# Altium PCB ElvipPCB.PcbDoc (part 2 of 3)
Units mm, origin at the board's own origin, x right, y up, seen from the top; angles counter-clockwise.
Board outline 279.53 x 216.03 mm, 2 copper layers (Top Layer, Bottom Layer), stack 2.071 mm thick; 97 components, 303 nets, 932 pads, 720 vias.
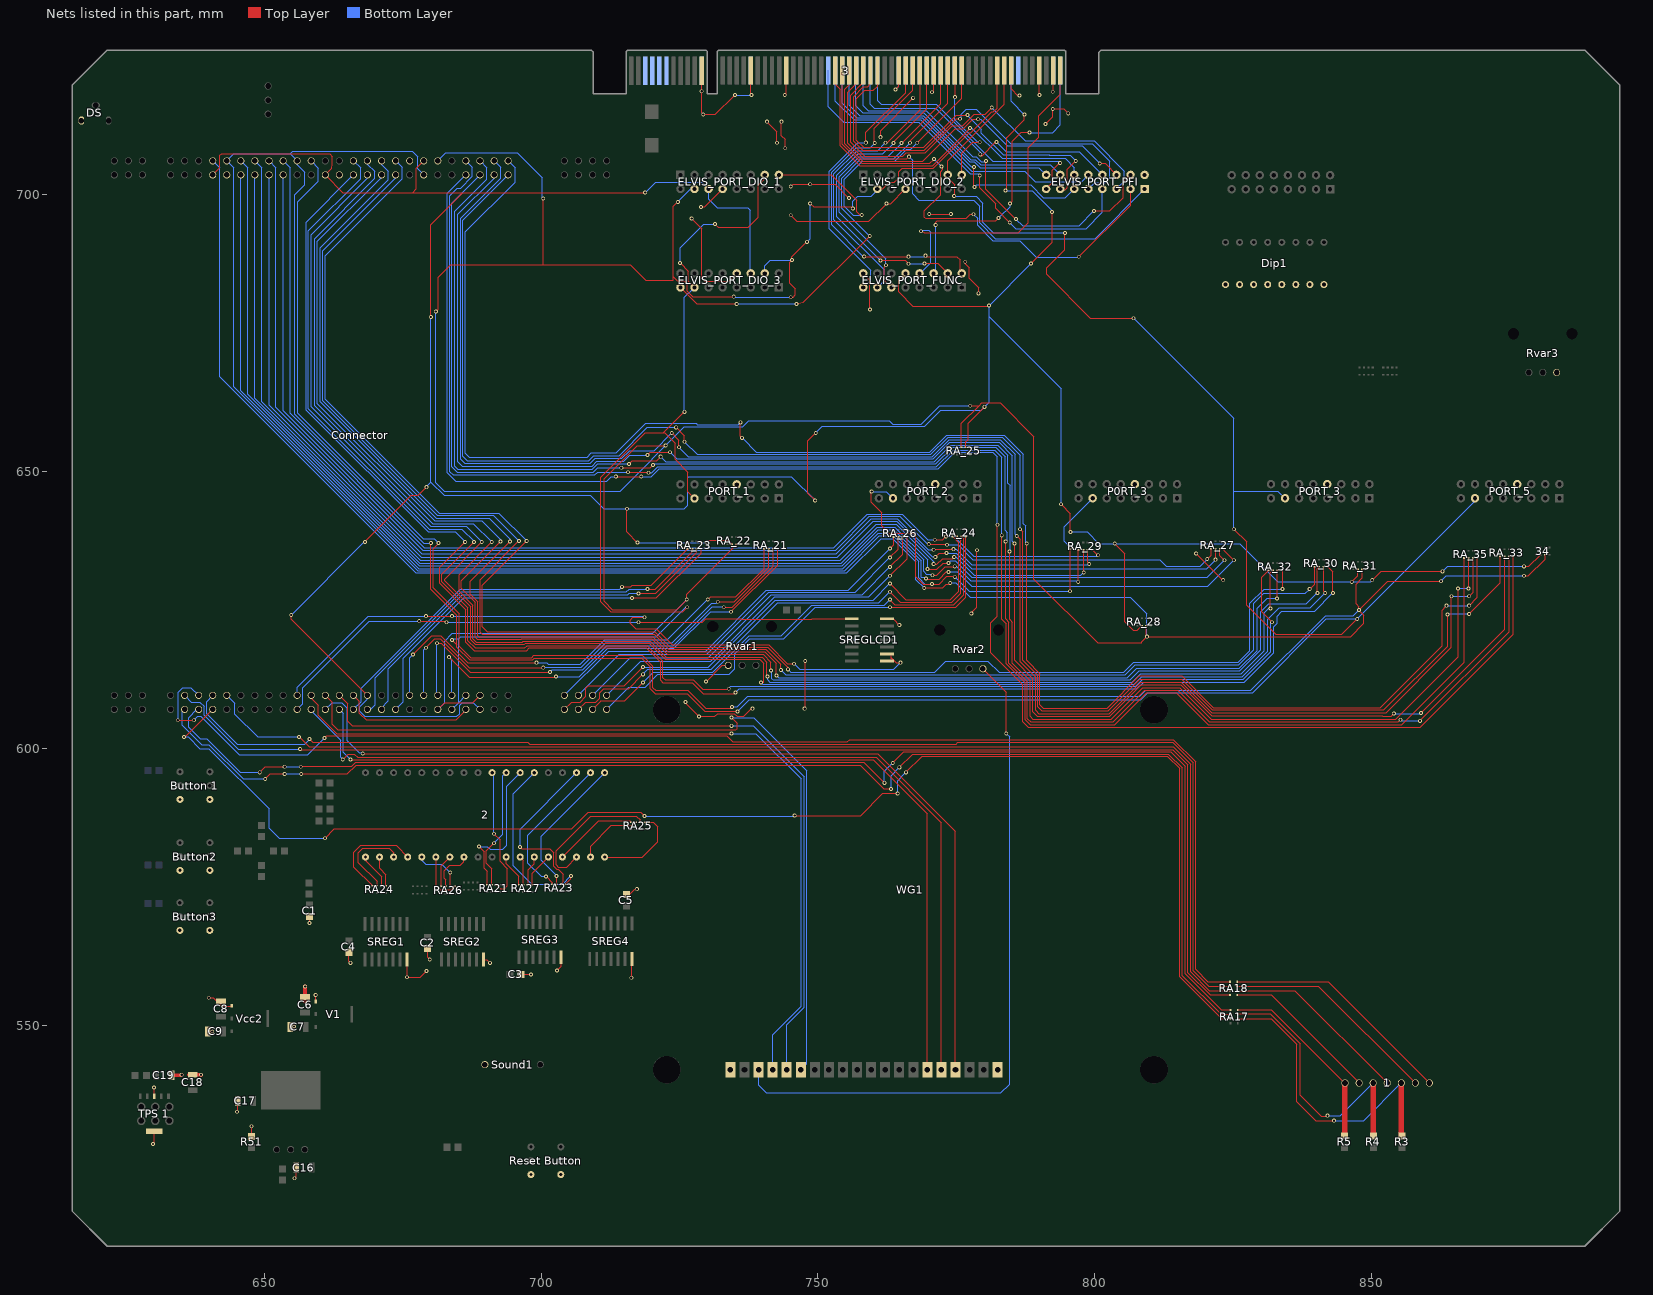
[diagram p2: the nets of this part, all layers, seen from the top]

## Via types
v1: diameter 0.7, hole 0.4, Top Layer to Bottom Layer, 720 vias

## Nets (pads, with @x,y where several pads share a name; then routed paths per layer and width w, separated by ;. In a path a pad name is that pad's centre, name@x,y a point inside that pad or via, vN(x,y) a via of type N, cw(c..) or ccw(c..) an arc to the next point about the centre after c; other vN are vias at no path point) (continued)
E_GEN: 3.50 Connector.8 Connector.13 Connector.43 Connector.89 Connector.105 ELVIS_PORT_DIO_1.6 ELVIS_PORT_DIO_2.6 ELVIS_PORT_DIO_3.6 P0RT_3.6 PORT_1.6 PORT_2.6 PORT_3.6 PORT_5.6 | length 979.9
  Top Layer w0.2: v1(680.1,637.1) 680.1,628.8 684.8,624.1 684.8,618.7 ; v1(683.9,619.6) 684.8,618.7 ; 722.1,657 v1(725.9,660.8) ; v1(725.1,687.7) 726.6,686.2 726.6,684.37 ELVIS_PORT_DIO_3.6@727.71,683.26 ; v1(726.4,625.5) 725.6,624.7 712.6,624.7 710.8,626.5 710.8,649 718.8,657 722.3,657 724.2,655.1 724.2,652.2 726.5,649.9 726.5,646.37 PORT_1.6@727.71,645.16 ; v1(731.4,694.7) 732,694.1 737.4,694.1 739.2,695.9 739.2,701.7 740.41,702.91 ELVIS_PORT_DIO_1.6@740.41,703.58 ; v1(735.5,606.7) 729.6,606.7 726.4,609.9 720.6,609.9 719.7,610.8 719.7,614.8 718.2,616.3 698.8,616.3 698.5,616 687.1,616 684.8,618.3 684.8,618.7 ; v1(759.7,646.4) 759.6,646.3 759.6,644.5 761.5,642.6 761.5,640.2 762.8,638.9 767.2,638.9 767.7,638.4 767.7,631 769,629.7 v1(770.6,629.7) 771.9,629.7 773.3,631.1 774.6,631.1 v1(774.7,631) ; v1(774.6,699.8) 774.7,699.9 774.7,701.8 773.43,703.07 ELVIS_PORT_DIO_2.6@773.43,703.58 773.43,706.12 783.62,716.31 3.50@783.62,722.46 ; v1(794.6,693.1) 794.6,690.1 791.3,686.8 791.3,685.6 799.2,677.7 v1(807,677.7) ; v1(795.5,628.4) 795.6,628.5 v1(795.6,636.3) ; v1(825.1,639.6) 827.4,637.3 827.4,625.9 832.7,620.6 844.6,620.6 v1(847.4,623.4)
  Bottom Layer w0.2: Connector.43@678.815,703.58 677.7,704.695 677.7,706.9 676.7,707.9 655.175,707.9 654.675,707.4 ; v1(680.1,637.1) 678.8,637.1 655.5,660.4 655.5,700 657.3,701.8 657.3,704.1 655.955,705.445 Connector.13@655.955,706.12 654.675,707.4 ; Connector.105@683.895,607.06 685.1,608.265 ; v1(683.9,619.6) 684.1,619.8 685.1,619.8 ; Connector.89@686.435,609.6 685.1,608.265 ; v1(725.1,687.7) 725.1,690.4 729.4,694.7 v1(731.4,694.7) ; v1@725.9,660.9 725.9,681.45 ELVIS_PORT_DIO_3.6@727.71,683.26 ; v1(726.4,625.5) 726.4,625.6 726.2,625.6 720.8,620.2 685.5,620.2 685.1,619.8 ; v1(735.5,606.7) 737.6,608.8 808.3,608.8 809.6,610.1 828.5,610.1 841.8,623.4 v1(847.4,623.4) 868.65,644.65 PORT_5.6@868.65,645.2 ; v1(759.7,646.4) 762.35,646.4 PORT_2.6@763.55,645.2 ; v1(770.6,629.7) 769.3,629.7 768.2,630.8 768.2,633.8 763.6,638.4 761.1,638.4 754.8,632.1 677.7,632.1 644.5,665.3 644.5,704.875 Connector.8@643.255,706.12 644.535,707.4 654.675,707.4 ; v1(774.6,699.8) 774.7,699.7 778.6,699.7 779.8,698.5 779.8,695 781.7,693.1 v1(794.6,693.1) ; v1(774.7,631) 777.3,628.4 v1(795.5,628.4) ; v1(795.6,636.3) 794.5,637.4 794.5,640.09 P0RT_3.6@799.61,645.2 ; v1(807,677.7) 825.1,659.6 825.1,646.5 ; v1(825.1,639.6) 825.1,646.5 ; PORT_3.6@834.35,645.2 833.05,646.5 825.1,646.5 ; 685.1,608.265 685.1,619.8
E_PF_12: 3.33 ELVIS_PORT_PFI.6 | length 68.9
  Top Layer w0.2: 3.33@760.99,722.23 3.33@760.76,722.46 760.76,719.6 760.01,718.85 758.47,718.85 756.94,717.32 756.94,709.84 758.23,708.55 769.09,708.55 774.94,714.4 v1(777,714.4) ; ELVIS_PORT_PFI.6@793.75,701.04 793.93,700.86 794.66,700.86 795.05,701.25 795.05,704.61 v1(796.55,706.11)
  Bottom Layer w0.2: v1(777,714.4) 779.53,711.87 779.53,711.11 783.46,707.18 791.76,707.18 791.8,707.14 795.52,707.14 v1(796.55,706.11)
E_PFI_0: 3.30 ELVIS_PORT_PFI.0 | length 84.2
  Top Layer w0.2: 3.30@756.95,722.46 756.95,720.05 755.38,718.48 755.38,709.33 758.23,706.48 766.06,706.48 v1(766.46,706.88) v1@766.65,706.69
  Bottom Layer w0.2: v1@766.435,706.855 767.09,706.2 767.09,700.14 768.19,699.04 778.13,699.04 779.24,697.93 779.24,694.9 779.22,694.9 782.02,692.1 800.05,692.1 ELVIS_PORT_PFI.0@808.99,701.04
E_PFI_1: 3.88 ELVIS_PORT_PFI.8 | length 47
  Bottom Layer w0.2: 3.88@755.68,722.46 755.68,716.2 757.58,714.3 769.05,714.3 777.43,705.92 778.25,705.92 779.28,704.89 789.9,704.89 ELVIS_PORT_PFI.8@791.21,703.58
E_PFI_2: 3.28 ELVIS_PORT_PFI.1 | length 92.8
  Top Layer w0.2: 3.28@754.41,722.46 754.41,709.14 757.88,705.67 770.18,705.67 v1(770.96,706.45) ; v1(772.3,705.1) 772.45,704.95 772.58,704.95 772.58,704.58 772.15,704.15 772.15,700.02 769.23,697.1 769.23,695.97 769.48,695.72 776.22,695.72 776.26,695.76 776.76,695.76 777.48,696.48 v1(778.09,696.48) ; v1@797.05,688.69 806.45,698.09 ELVIS_PORT_PFI.1@806.45,701.04
  Bottom Layer w0.2: v1(770.96,706.45) 772.3,705.11 v1(772.3,705.1) ; v1(778.09,696.48) 778.82,695.75 778.82,694.46 781.58,691.7 786.4,691.7 789.41,688.69 796.99,688.69 v1(797.1,688.8)
E_PFI_3: 3.87 ELVIS_PORT_PFI.9 | length 48.5
  Bottom Layer w0.2: 3.87@756.95,722.46 756.81,722.32 756.81,716.09 758.1,714.8 769.15,714.8 777.6,706.35 778.42,706.35 779.39,705.38 791.95,705.38 ELVIS_PORT_PFI.9@793.75,703.58
E_PFI_4: 3.31 ELVIS_PORT_PFI.2 | length 76.6
  Top Layer w0.2: 3.31@758.22,722.46 758.22,720.33 755.9,718.01 755.9,709.49 758.43,706.96 765.35,706.96 765.98,707.59 769.39,707.59 769.38,707.6 774.28,712.5 776.19,712.5 778.22,714.53 780.17,714.53 v1(781.39,715.75)
  Bottom Layer w0.2: v1(781.39,715.75) 787.42,709.72 799.86,709.72 805.34,704.24 805.34,702.47 ELVIS_PORT_PFI.2@803.91,701.04
E_PFI_5: 3.27 ELVIS_PORT_PFI.10 | length 65.2
  Top Layer w0.2: 3.27@753.14,722.46 753.14,719.91 753.99,719.06 753.99,708.84 757.59,705.24 770.74,705.24 777.26,711.76 777.26,711.84 v1(777.45,712.03)
  Bottom Layer w0.2: v1@777.19,712.03 777.78,712.03 783.24,706.57 794.62,706.57 796.29,704.9 ELVIS_PORT_PFI.10@796.29,703.58
E_PFI_6: 3.91 ELVIS_PORT_PFI.3 | length 72.4
  Top Layer w0.2: v1(779.22,703.49) 779.22,701.25 782.07,698.4 782.07,697.54 v1(784.64,694.97)
  Bottom Layer w0.2: 3.91@751.87,722.46 751.87,715.87 754.64,713.1 768.18,713.1 777.53,703.75 778.96,703.75 v1(779.22,703.49) ; v1(784.64,694.97) 785.71,693.9 798.46,693.9 801.38,696.82 ELVIS_PORT_PFI.3@801.38,701
E_PFI_7: 3.90 ELVIS_PORT_PFI.11 | length 57.8
  Bottom Layer w0.2: 3.90@753.14,722.46 753.14,716.9 756.54,713.5 768.53,713.5 777.77,704.26 787.32,704.26 789.22,702.36 797.61,702.36 ELVIS_PORT_PFI.11@798.83,703.58
E_PFI_8: 3.32 ELVIS_PORT_PFI.4 | length 77.3
  Top Layer w0.2: 3.32@759.49,722.46 759.49,720.01 758.97,719.49 758.19,719.49 756.43,717.73 756.43,709.68 758.11,708 769.21,708 774.94,713.73 v1(775.64,713.73) ; v1(775.64,713.73) 775.7,713.73 775.84,713.59 775.78,713.59 v1(775.64,713.73)
  Bottom Layer w0.2: v1(775.64,713.73) 775.7,713.73 775.84,713.59 775.84,714.5 775.85,714.5 776.8,715.45 778.63,715.45 784.83,709.25 799.51,709.25 802.72,706.04 802.72,703.06 801.85,702.19 799.98,702.19 ELVIS_PORT_PFI.4@798.83,701.04
E_PFI_9: 3.85 ELVIS_PORT_PFI.12 | length 56
  Top Layer w0.2: v1(779.3,707.3) 779.55,707.05 779.55,706.96 782.14,709.55 v1(782.24,709.55)
  Bottom Layer w0.2: 3.85@759.49,722.46 759.49,716.31 760.2,715.6 771.31,715.6 779.55,707.36 779.49,707.3 v1(779.3,707.3) ; v1(782.24,709.55) 784.01,707.78 797.17,707.78 ELVIS_PORT_PFI.12@801.37,703.58
E_PFI_10: 3.89 ELVIS_PORT_PFI.5 | length 58
  Top Layer w0.2: v1(778.18,705.02) 778.18,701.63 778.125,701.575 v1(778.29,701.41)
  Bottom Layer w0.2: 3.89@754.41,722.46 754.41,716.54 757.05,713.9 768.84,713.9 777.72,705.02 v1(778.18,705.02) ; v1@778.265,701.385 778.66,701.78 788.39,701.78 790.72,699.45 794.7,699.45 ELVIS_PORT_PFI.5@796.29,701.04
E_PFI_11: 3.29 ELVIS_PORT_PFI.13 | length 71.2
  Top Layer w0.2: 3.29@755.68,722.46 755.68,719.86 754.88,719.06 754.88,709.25 758.05,706.08 768.97,706.08 774.82,711.93 776.22,711.93 777.92,713.63 v1(778.93,713.63) ; v1(800.9,705.65) 801.84,705.65 ELVIS_PORT_PFI.13@803.91,703.58
  Bottom Layer w0.2: v1(778.93,713.63) 779.39,713.63 784.17,708.85 797.7,708.85 v1(800.9,705.65)
E_PFI_13: 3.86 ELVIS_PORT_PFI.14 | length 72.2
  Top Layer w0.2: v1(780.33,706.11) 780.33,701.01 v1@785.76,695.58 ; v1(785.76,695.6) v1@785.76,695.58 ; v1@785.79,695.55 v1@785.76,695.58 ; v1(799.83,697.07) 802.72,697.07 805.14,699.49 805.14,702.27 ELVIS_PORT_PFI.14@806.45,703.58
  Bottom Layer w0.2: 3.86@758.22,722.46 758.22,716.04 759.06,715.2 769.57,715.2 777.92,706.85 778.61,706.85 779.47,705.99 780.21,705.99 v1(780.33,706.11) ; v1(785.76,695.6) 786.97,694.39 797.15,694.39 v1(799.83,697.07)
E_PFI_14: 3.84 ELVIS_PORT_PFI.7 | length 48.9
  Top Layer w0.2: ELVIS_PORT_PFI.7@791.21,701.04 792.31,702.14 792.31,704.46 793.58,705.73 v1(793.74,705.73)
  Bottom Layer w0.2: 3.84@760.76,722.46 760.76,717 761.46,716.3 771.33,716.3 781.61,706.02 793.45,706.02 v1(793.74,705.73)
E_SUP+: 3.59 ELVIS_PORT_FUNC.13 | length 55.7
  Top Layer w0.2: v1(771.26,694.52) 771.26,694.99 771.57,695.3 782.1,695.3 v1(782.6,695.8) ; v1(784.69,698.4) 785.1,698.81 785.1,709.66 786.69,711.25 v1(788.19,711.25)
  Bottom Layer w0.2: ELVIS_PORT_FUNC.13@770.89,685.8 771.26,686.17 v1(771.26,694.52) ; v1(782.6,695.8) 782.94,696.14 782.96,696.14 784.69,697.87 v1(784.69,698.4) ; v1(788.19,711.25) 788.2,711.24 792.37,711.24 793.78,712.65 3.59@793.78,722.46
E_SUP-: 3.58 ELVIS_PORT_FUNC.12 | length 60.8
  Top Layer w0.2: ELVIS_PORT_FUNC.12@768.2,685.95 ELVIS_PORT_FUNC.12@768.35,685.8 ; v1(768.6,693.4) 768.86,693.4 769.16,693.1 786.17,693.1 787.98,694.91 787.98,708.46 789.9,710.38 789.9,714.26 793.75,718.11 793.75,722.43 3.58@793.78,722.46
  Bottom Layer w0.2: ELVIS_PORT_FUNC.12@768.35,685.8 768.5,685.8 770.4,687.7 770.4,693.2 770,693.6 768.8,693.6 v1(768.6,693.4)
E_SYNC: 3.49 34.1 Connector.7 Connector.14 Connector.23 Connector.90 Connector.106 ELVIS_PORT_DIO_1.14 ELVIS_PORT_DIO_2.14 ELVIS_PORT_DIO_3.14 RA_22.5 RA_25.5 RA_28.1 RA_31.5 | length 1159.1
  Top Layer w0.2: v1(681,678.9) 681.4,679.3 681.4,685.1 683.7,687.4 700.4,687.4 ; Connector.106@681.355,607.06 682.595,608.3 687.675,608.3 Connector.90@688.975,609.6 ; v1(681.5,637.1) 680.5,636.1 680.5,629 685.2,624.3 685.2,618.5 687.3,616.4 698.3,616.4 698.7,616.8 718.3,616.8 720.2,614.9 720.2,611 720.7,610.5 726.5,610.5 729.7,607.3 734.3,607.3 v1(734.5,607.5) ; v1(700.4,699.3) 700.4,687.4 ; v1(722.5,654.7) 717.4,654.7 711.4,648.7 711.4,626.6 712.9,625.1 724.5,625.1 v1(726.3,626.9) 726.3,627.9 RA_22.5@735.3,636.9 ; v1(724.7,698.7) 723.9,697.9 723.9,685.2 ; v1(734.8,681.6) 727.4,681.6 726.4,682.6 726.4,683.9 725.8,684.5 724.6,684.5 723.9,685.2 ; v1(745.1,681.5) 745.5,681.5 745.9,681.9 745.9,683 744.9,684 744.9,687.8 v1(745.3,688.2) 745.3,688.8 v1(748,691.5) ; v1(748.6,698.4) 749.2,697.8 756.3,697.8 v1(756.3,697.5) ; ELVIS_PORT_DIO_2.14@760.73,701.04 761.66,701.04 762.86,702.24 763.82,702.24 764.55,702.97 764.55,704.11 765.19,704.75 770.85,704.75 777.3,711.2 777.6,711.2 781.4,715 781.7,715 782.35,715.65 3.49@782.35,722.46 ; v1(769.2,629) 772.5,629 773.2,629.7 773.7,629.7 v1(773.9,629.9) ; RA_25.5@775.9,654.4 775.9,658.7 779.1,661.9 ; v1(777.5,661.9) 779.1,661.9 ; RA_28.1@809.3,622.2 809.3,620.3 v1(809.4,620.2) ; v1@847.5,625.2 v1(847.7,625) ; RA_31.5@848.3,632.4 848.3,630.8 847.2,629.7 847.2,626.1 847.7,625.6 v1(847.7,625) ; v1(862.5,630.2) 852.9,630.2 v1(847.7,625) ; v1(877.5,631.2) 878.3,631.2 881.3,634.2 34.1@881.3,635 ; 700.4,687.4 716.1,687.4 718.9,684.6 723.9,684.6 723.9,685.2 ; 779.1,661.9 779.6,662.4 782.9,662.4 789,656.3 789,630.6 800.5,619.1 808.5,619.1 808.5,619.3 v1(809.4,620.2) ; v1(809.4,620.2) 846.2,620.2 848.6,622.6 848.6,624.1 v1(847.7,625)
  Bottom Layer w0.2: Connector.7@640.715,706.12 642,704.835 642,667.1 677.4,631.7 755.2,631.7 761.4,637.9 763.5,637.9 767.7,633.7 767.7,630.5 v1(769.2,629) ; Connector.14@658.495,706.12 659.8,704.815 659.8,702.4 656.1,698.7 656.1,660.5 678.7,637.9 680.7,637.9 v1(681.5,637.1) ; v1(681,678.9) 681,648 682.5,646.5 714.3,646.5 725.9,658.1 736.4,658.1 737.5,659.2 762.9,659.2 763.5,658.6 768.7,658.6 ; Connector.106@681.355,607.06 682.6,608.305 682.6,619.4 684,620.8 720.2,620.8 v1(726.3,626.9) ; Connector.23@681.355,706.12 682.835,707.6 695.7,707.6 700.2,703.1 700.2,699.5 v1(700.4,699.3) ; v1(724.7,698.7) 727.04,701.04 ELVIS_PORT_DIO_1.14@727.71,701.04 ; v1(734.5,607.5) 735.4,607.5 737.3,609.4 808.1,609.4 809.2,610.5 828.2,610.5 841.7,624 846.7,624 v1(847.7,625) ; v1(734.8,681.6) 734.9,681.5 v1(745.1,681.5) ; ELVIS_PORT_DIO_3.14@740.41,685.8 740.41,687.21 741.4,688.2 v1(745.3,688.2) ; v1(748,691.5) 748.6,692.1 v1(748.6,698.4) ; v1(756.3,697.5) 756.3,698.8 757.2,699.7 759.6,699.7 760.73,700.83 ELVIS_PORT_DIO_2.14@760.73,701.04 ; 769,658.9 768.7,658.6 ; v1(773.9,629.9) 774.9,629.9 777.5,627.3 806.4,627.3 809.4,624.3 v1(809.4,620.2) ; v1(777.5,661.9) 772,661.9 768.7,658.6 ; v1(862.5,630.2) 863.5,631.2 v1(877.5,631.2)
E_VCC: 3.66 34.2 Connector.22 Connector.50 Connector.58 Connector.82 Connector.103 ELVIS_PORT_DIO_1.13 ELVIS_PORT_DIO_3.13 ELVIS_PORT_FUNC.11 RA_22.6 RA_25.6 RA_28.2 RA_31.6 | length 677.4
  Top Layer w0.2: Connector.58@640.715,703.58 642,704.865 642,707.1 642.3,707.4 661.8,707.4 662.3,706.9 662.3,705.2 662.2,705.1 662.2,704.745 Connector.50@661.035,703.58 664.215,700.4 676.8,700.4 ; v1(654.9,624.1) 654.9,623.355 Connector.82@668.655,609.6 ; v1(668.2,637.3) 676.6,645.7 677.8,645.7 v1(679.3,647.2) ; Connector.22@678.815,706.12 677.5,704.805 677.5,701.1 676.8,700.4 ; v1(680.1,677.9) 680.1,694.6 685.9,700.4 ; v1@715.5,643.4 715.5,639.1 v1(717.4,637.2) ; v1(718.8,700.4) 685.9,700.4 ; v1(730,637.2) 730.4,637.6 733.8,637.6 RA_22.6@734.5,636.9 ; v1(749.5,644.8) 748.2,646.1 748.2,655.6 v1(749.6,657) ; ELVIS_PORT_FUNC.11@765.81,685.8 764.56,684.55 764.56,682.45 767.16,679.85 780.75,679.85 v1(780.9,680) ; RA_25.6@776.7,654.4 776.7,655.4 777.1,655.8 777.1,658.7 v1(780.1,661.7) ; v1(783.85,700.76) 784.06,700.97 784.06,710.38 784.17,710.38 787.29,713.5 v1(787.29,714.47) ; v1(788.5,687.6) 792.28,691.38 v1(792.28,696.91) ; v1(793.9,644.1) 795.6,642.4 v1(795.6,639.1) ; v1(803.6,637) 805.4,635.2 805.4,622.9 806.9,621.4 807.7,621.4 RA_28.2@808.5,622.2 ; v1(846.4,630.1) 847.5,631.2 RA_31.6@847.5,632.4 ; v1(850.1,630.4) 851.7,632 v1(862.8,632) ; v1(877.5,632.9) 878.4,632.9 34.2@880.5,635 ; 676.8,700.4 685.9,700.4
  Bottom Layer w0.2: v1(654.9,624.1) 668.1,637.3 v1(668.2,637.3) ; Connector.82@668.655,609.6 668.655,608.855 667.3,607.5 667.3,606.7 668.2,605.8 684.8,605.8 685.3,606.3 685.3,607.8 685.8,608.3 687.735,608.3 Connector.103@688.975,607.06 ; v1(679.3,647.2) 679.3,647.3 680.1,648.1 ; v1(680.1,677.9) 680.1,648.1 ; v1(717.4,637.2) v1(730,637.2) ; v1(718.8,700.4) 720.7,702.3 728.99,702.3 ELVIS_PORT_DIO_1.13@730.25,701.04 730.25,699.18 731.78,697.65 737.35,697.65 737.77,697.23 737.77,685.9 ELVIS_PORT_DIO_3.13@737.87,685.8 ; v1(749.5,644.8) 745.2,649.1 726.7,649.1 726.5,648.9 726.5,643.95 725.85,643.3 711.3,643.3 708.9,645.7 682.5,645.7 680.1,648.1 ; v1(749.6,657) 750.8,658.2 769.3,658.2 772.2,661.1 779.5,661.1 780.9,662.5 v1(780.9,680) v1(788.5,687.6) ; 780.9,678 793.9,665 v1(793.9,644.1) ; v1(783.85,700.76) 788.67,700.76 792.28,697.15 v1(792.28,696.91) ; 3.66@784.89,722.46 784.89,716.87 v1(787.29,714.47) ; v1(795.6,639.1) 798.6,639.1 800.7,637 v1(803.6,637) 826.15,637 833.05,630.1 v1(846.4,630.1) 849.8,630.1 v1(850.1,630.4) ; v1(862.8,632) 863.7,632.9 v1(877.5,632.9)
  other v1: 715.5,643.3
EAI_0+: 3.45 ELVIS_PORT_DIO_1.7 | length 60.2
  Top Layer w0.2: ELVIS_PORT_DIO_1.7@742.95,703.58 752.42,703.58 757,699 757,696.94 757.62,696.32 v1(757.92,696.32) ; v1(767.94,709.39) 776,717.45 3.45@776,722.46
  Bottom Layer w0.2: v1(757.92,696.32) 756.37,696.32 754.79,697.9 754.79,702.79 758.03,706.03 763.84,706.03 766.02,708.21 766.76,708.21 v1(767.94,709.39)
EAI_1+: 3.44 ELVIS_PORT_DIO_2.7 | length 23.1
  Top Layer w0.2: 3.44@774.73,722.46 774.77,722.42 v1(774.77,717.62) ; ELVIS_PORT_DIO_2.7@775.97,703.58 775.97,707.47 777.97,709.47 v1(779.23,709.47)
  Bottom Layer w0.2: v1(774.77,717.62) 774.73,717.58 774.73,713.56 778.82,709.47 v1(779.23,709.47)
EAI_2+: 3.43 ELVIS_PORT_DIO_3.7 | length 83.8
  Top Layer w0.2: ELVIS_PORT_DIO_3.7@725.17,683.26 728.15,680.28 v1(735.32,680.28) ; v1(746.12,680.28) 747.38,680.58 v1(759.35,692.55) ; v1(766.63,709.4) 766.63,709.73 773.46,716.56 3.43@773.46,722.46
  Bottom Layer w0.2: v1(735.32,680.28) v1(746.12,680.28) ; v1(759.35,692.55) 754.32,697.58 754.32,703.02 757.76,706.46 763.69,706.46 v1(766.63,709.4)
EAI_3+: 3.42 ELVIS_PORT_FUNC.5 | length 54
  Top Layer w0.2: v1(762.28,687.27) 761.95,686.94 761.95,684.58 ELVIS_PORT_FUNC.5@763.27,683.26 ; v1(765.09,709.34) 772.19,716.44 3.42@772.19,722.46
  Bottom Layer w0.2: v1(762.28,687.27) 762.28,688.42 753.85,696.85 753.85,703.25 757.47,706.87 762.62,706.87 v1(765.09,709.34)
EAI_4+: 3.40 ELVIS_PORT_FUNC.14 | length 60.2
  Top Layer w0.2: v1(761.32,688.15) 765.73,688.15 v1(766.33,687.55) ; v1@763.65,709.33 763.65,709.55 769.65,715.55 3.40@769.65,722.46 ; v1(769.24,687.61) 771.62,687.61 ELVIS_PORT_FUNC.14@773.43,685.8
  Bottom Layer w0.2: v1(761.32,688.15) 761.25,688.08 761.22,688.08 761.22,688.18 753.41,695.99 753.41,703.51 757.29,707.39 761.73,707.39 v1@763.66,709.32 ; v1(766.33,687.55) 769.18,687.55 v1(769.24,687.61)
  other v1: 763.63,709.33
EAI_5+: 3.39 ELVIS_PORT_FUNC.6 | length 52.3
  Top Layer w0.2: v1(762.2,709.39) 762.49,709.39 768.49,715.39 768.49,722.35 3.39@768.38,722.46
  Bottom Layer w0.2: ELVIS_PORT_FUNC.6@760.73,683.26 761.93,684.46 761.93,686.43 752.88,695.48 752.88,703.78 757.06,707.96 760.77,707.96 v1(762.2,709.39)
EAI_6+: 3.38 ELVIS_PORT_FUNC.15 | length 64.8
  Top Layer w0.2: v1(758.35,688.84) 766.32,688.84 v1(766.34,688.82) ; v1@760.2,709.13 760.2,712 767.11,718.91 3.38@767.11,722.46 ; v1@769.3,688.84 769.28,688.82 v1@769.58,688.82 ; v1(769.4,689) v1@769.58,688.82 ; 769.9,688.82 v1@769.58,688.82 ; ELVIS_PORT_FUNC.15@775.97,685.8 775.66,686.11 775.66,688.25 775.09,688.82 v1@769.58,688.82
  Bottom Layer w0.2: v1(758.35,688.84) 758.22,688.84 752.47,694.59 752.47,704.07 756.91,708.51 759.46,708.51 v1(760.27,709.32) ; v1(766.34,688.82) 769.22,688.82 v1(769.4,689)
EAI_7+: 3.37 ELVIS_PORT_FUNC.7 | length 49.6
  Top Layer w0.2: v1@758.65,709.29 v1(758.65,709.41) 758.65,711.27 765.84,718.46 3.37@765.84,722.46
  Bottom Layer w0.2: ELVIS_PORT_FUNC.7@758.19,683.26 759.51,684.58 759.51,686.35 752,693.86 752,704.22 757.19,709.41 v1(758.65,709.41)
GND: 3.10 3.15 3.20 3.36 3.41 3.51 3.55 3.57 3.60 3.65 3.72 3.73 3.74 3.75 3.76 3.77 3.78 3.79 3.80 3.81 3.102 3.107 3.112 3.113 3.114 3.115 "Button 1.1" "Button 1.4" "Reset Button.1" "Reset Button.4" "TPS 1.2" "TPS 1.5" Button2.1 Button2.4 Button3.1 Button3.4 C1.1 C2.1 C3.1 C4.1 C5.1 C6.2 C7.2 C8.2 C9.2 C16.2 C17.2 C18.2 C19.1 Connector.21 Connector.49 Connector.57 Connector.81 Connector.104 Dip1.9 Dip1.10 Dip1.11 Dip1.12 Dip1.13 Dip1.14 Dip1.15 Dip1.16 DS.2 ELVIS_PORT_DIO_1.12 ELVIS_PORT_DIO_2.12 ELVIS_PORT_DIO_3.12 ELVIS_PORT_FUNC.8 ELVIS_PORT_PFI.15 P0RT_3.12 PORT_1.12 PORT_2.12 PORT_3.12 PORT_5.12 R51.1 Rvar1.0 Rvar3.2 Sound1.0 SREG1.7 SREG2.7 SREG3.7 SREG4.7 SREGLCD1.7 V1.0 Vcc2.0 WG1.0 WG1.19 | length 279.9
  Top Layer w0.2: v1(629.9,528.6) 630.17,528.87 630.17,530.91 ; v1(630.1,538.8) 630.16,538.74 630.16,537.2 ; v1@638.56,541.06 v1(638.6,541.1) ; v1(640,555) 640.82,555 642.36,553.46 644.08,553.46 Vcc2.0@644.16,553.54 ; v1(645.1,534.4) 645.21,534.51 645.21,535.96 C17.2@645.61,536.36 ; v1(647.7,531.8) 647.74,531.76 R51.1@647.74,529.95 ; v1(655.4,549.8) 655.43,549.8 v1@655.5,549.73 ; v1(655.5,522.4) 655.76,522.66 C16.2@655.76,524.32 ; v1(658.2,568.5) C1.1@658.2,569.7 ; V1.0@659.3,554.33 v1(659.3,555.5) ; C4.1@665.3,563.2 665.3,561.6 v1(665.6,561.3) ; Connector.81@666.115,609.6 667.2,608.515 667.2,606.4 668.4,605.2 684.7,605.2 686.435,606.935 Connector.104@686.435,607.06 ; SREG1.7@675.82,561.9 675.82,558.72 v1(675.8,558.7) 678.2,558.7 v1(679.3,559.8) ; C2.1@679.5,563.9 679.5,562.3 v1(679.9,561.9) ; SREG2.7@689.62,561.9 690.2,561.9 v1(690.8,561.3) ; C3.1@696.7,559.2 v1(698.2,559.2) ; v1(702.9,559.9) 702.9,560 703.62,560.72 SREG3.7@703.62,562.3 ; C5.1@715.2,573.6 C5.1@715.4,573.6 715.9,573.6 716.9,574.6 v1(717.3,574.6) ; v1(716.3,558.6) 716.42,558.72 SREG4.7@716.42,562 ; v1(726.1,608.4) 726.1,608.2 v1(728.5,605.8) 731.4,605.8 731.9,606.3 734.9,606.3 735.4,605.8 736.6,605.8 738,607.2 v1(738.2,607.2) ; v1(727.2,695.7) 729,693.9 729,685 729.6,684.4 733.93,684.4 ELVIS_PORT_DIO_3.12@735.33,685.8 ; v1(728.9,697.8) 729.55,697.8 ELVIS_PORT_DIO_1.12@732.79,701.04 ; 3.10@729,722.4 v1(729,718.7) 729,714.8 v1(729.3,714.5) 731.5,714.5 v1(735,718) ; v1(729.8,612.1) 732.7,615 Rvar1.0@733.8,615 ; 3.15@737.9,722.46 737.9,718.1 v1(738,718) ; v1(740.8,713.2) 742.6,711.4 v1(742.6,709.4) ; v1(743.4,713.2) 743.4,710.7 744.1,710 v1(744.1,708.4) ; v1(744,718) 744.25,718.25 3.20@744.25,722.46 ; v1(745.1,696.3) 746.2,695.2 759.2,695.2 v1(762.4,698.4) 763.17,698.4 ELVIS_PORT_DIO_2.12@765.81,701.04 ; v1(745.1,701.5) 745.5,701.9 v1(748.6,701.9) 753.1,701.9 v1(755.6,699.4) ; v1(747.6,607.2) 747.7,607.3 v1(747.7,615.8) ; ELVIS_PORT_FUNC.8@758.19,685.8 759.4,684.59 v1(759.4,679.3) ; v1(761.3,710.4) 761.3,711.6 v1(767.2,717.5) ; SREGLCD1.7@762.5,623.42 763.58,623.42 v1(764.7,622.3) ; v1(764,719) 764.57,719.57 3.36@764.57,722.46 ; v1(770.1,696.5) v1(774,696.5) ; v1(770.6,718.5) 770.92,718.82 3.41@770.92,722.46 ; v1(776.6,687.9) 776.6,687.5 777.3,686.8 777.3,684.9 779,683.2 v1(779,682.2) ; v1(777.7,624.4) 777.7,624.5 778.7,625.5 v1(778.7,635.8) ; 3.51@784.89,722.46 784.89,719.11 786.1,717.9 v1(786.4,717.9) ; 3.55@789.97,722.46 789.97,718.03 v1(790,718) ; v1(791.1,712.8) 792.4,714.1 v1(792.4,715.5) 794.4,715.5 v1(795.2,714.7) ; v1(792.4,718.6) 792.51,718.71 3.57@792.51,722.46 ; v1(818.3,635.2) 823.1,630.4 v1(823.2,630.4)
  Top Layer w0.7: C19.1@633.3,541 635,541 v1(635.1,541.1) ; C18.2@636.4,541.1 C18.2@637.1,541.1 638.52,541.1 v1@638.56,541.06 ; 657.4,554.33 C6.2@657.4,555.13 v1(657.4,557)
  Bottom Layer w0.2: v1(729,718.7) 3.107@729,722.4 ; v1(735,718) v1(738,718) ; v1(748.6,701.9) v1@748.7,701.9 ; v1(764,719) 764.57,719.57 3.81@764.57,722.46 ; v1(770.1,696.5) v1@770.2,696.6 ; v1@776.6,687.8 v1(776.6,687.9) ; v1(778.7,635.8) 778.7,635.9 v1@778.8,636
  other v1: 640.62,548.9
"IDC10.1. 1": Connector.88 RA_21.4 | length 79.8
  Top Layer w0.2: v1(683.4,616.5) 687,612.9 ; 687.5,612.9 687,612.9 ; v1(702.7,613) 702.6,612.9 687,612.9 ; v1(734.3,624.7) 742.7,633.1 RA_21.4@742.7,636.1
  Bottom Layer w0.2: v1(683.4,616.5) 683.895,616.005 Connector.88@683.895,609.6 ; v1(702.7,613) 706.9,613 712,618.1 724,618.1 730.6,624.7 v1(734.3,624.7)
"IDC10.1. 2": Connector.112 RA_23.3 | length 73.9
  Top Layer w0.2: v1(714.6,629.2) 716.2,629.2 716.5,629.5 719.9,629.5 RA_23.3@726.5,636.1
  Bottom Layer w0.2: Connector.112@666.115,607.06 667.5,608.445 667.5,610.9 685.4,628.8 714.2,628.8 v1(714.6,629.2)
"IDC10.1. 3": Connector.87 RA_21.5 | length 83.5
  Top Layer w0.2: v1(681.2,619) 682,619 687.2,613.8 v1(701.6,613.8) ; v1(733,625.5) 734.5,625.5 741.9,632.9 RA_21.5@741.9,636.1
  Bottom Layer w0.2: v1(681.2,619) 681.2,609.755 Connector.87@681.355,609.6 ; v1(701.6,613.8) 702,614.2 707.5,614.2 711.9,618.6 723.9,618.6 730.9,625.6 732.9,625.6 v1(733,625.5)
"IDC10.1. 4": Connector.111 RA_23.2 | length 73.9
  Top Layer w0.2: v1(719.2,628.8) 720.6,628.8 727.3,635.5 RA_23.2@727.3,636.1
  Bottom Layer w0.2: Connector.111@668.655,607.06 669.26,607.06 670.1,607.9 670.1,612.8 685.6,628.3 715.4,628.3 715.9,628.8 v1(719.2,628.8)
"IDC10.1. 5": Connector.86 RA_21.6 | length 84.4
  Top Layer w0.2: v1(679.2,618.2) 680.8,619.8 681.8,619.8 682.45,619.15 687,614.6 v1(700.4,614.6) ; v1(731.9,626.5) 734.9,626.5 741.1,632.7 RA_21.6@741.1,636.1
  Bottom Layer w0.2: Connector.86@678.815,609.6 678.815,617.815 v1(679.2,618.2) ; v1(700.4,614.6) 700.5,614.7 707.3,614.7 711.7,619.1 723.7,619.1 730.8,626.2 731.6,626.2 v1(731.9,626.5)
"IDC10.1. 6": Connector.110 RA_23.1 | length 72.9
  Top Layer w0.2: v1(717.6,628) 720.7,628 728.1,635.4 RA_23.1@728.1,636.1
  Bottom Layer w0.2: Connector.110@671.195,607.06 671.195,607.395 672.4,608.6 672.4,614.4 685.8,627.8 715.7,627.8 715.9,628 v1(717.6,628)
"IDC10.1. 7": Connector.85 RA_21.7 | length 85.3
  Top Layer w0.2: v1(676.9,617) 680.3,620.4 681.9,620.4 686.8,615.5 v1(699.2,615.5) ; v1(730.1,626.9) 730.6,627.4 735.2,627.4 740.3,632.5 RA_21.7@740.3,636.1
  Bottom Layer w0.2: Connector.85@676.275,609.6 676.275,616.375 v1(676.9,617) ; v1(699.2,615.5) 701,615.5 701.3,615.2 707.1,615.2 711.5,619.6 722.8,619.6 v1@730.05,626.85
"IDC10.1. 8": Connector.109 RA_23.0 | length 72.3
  Top Layer w0.2: v1(716.4,627.2) 720.8,627.2 728.9,635.3 RA_23.0@728.9,636.1
  Bottom Layer w0.2: Connector.109@673.735,607.06 675.1,608.425 675.1,616.3 686,627.2 v1(716.4,627.2)
"IDC10.2. 1": Connector.97 RA_24.0 | length 85.8
  Top Layer w0.2: v1(763,625.5) 774.9,625.5 776.7,627.3 RA_24.0@776.7,638.3
  Bottom Layer w0.2: Connector.97@711.835,607.06 715.875,611.1 718.8,611.1 721.1,613.4 734,613.4 735,614.4 735,617.1 737.7,619.8 743.8,619.8 749.5,625.5 v1(763,625.5)
"IDC10.2. 2": Connector.96 RA_26.0 | length 68.4
  Top Layer w0.2: v1(763,631.2) 766.1,634.3 RA_26.0@766.1,638.2
  Bottom Layer w0.2: Connector.96@711.835,609.6 718.035,615.8 730.6,615.8 742.2,627.4 759.2,627.4 v1(763,631.2)
"IDC10.2. 3": Connector.98 RA_24.1 | length 87
  Top Layer w0.2: Connector.98@709.295,607.06 710.8,608.565 710.8,608.6 715.1,608.6 v1(718.4,611.9) ; v1(763,626.9) 763.9,626 774.5,626 776.3,627.8 776.3,637.9 RA_24.1@775.9,638.3
  Bottom Layer w0.2: v1(718.4,611.9) 720.3,613.8 731,613.8 737.6,620.4 743.4,620.4 748.9,625.9 762,625.9 v1(763,626.9)
"IDC10.2. 4": Connector.95 RA_26.1 | length 69.7
  Top Layer w0.2: v1(763,632.8) 765.3,635.1 RA_26.1@765.3,638.2
  Bottom Layer w0.2: Connector.95@709.295,609.6 716.095,616.4 730.2,616.4 741.6,627.8 758,627.8 v1(763,632.8)
"IDC10.2. 5": Connector.99 RA_24.2 | length 90.5
  Top Layer w0.2: Connector.99@706.755,607.06 708.095,608.4 709.9,608.4 710.6,609.1 710.6,610.1 711.3,610.8 715.8,610.8 v1(718.4,613.4) ; v1(763,628.3) 764.9,626.4 774.2,626.4 775.8,628 775.8,637.6 RA_24.2@775.1,638.3
  Bottom Layer w0.2: v1(718.4,613.4) 719.3,614.3 730.7,614.3 742.7,626.3 761,626.3 v1(763,628.3)
"IDC10.2. 6": Connector.94 RA_26.2 | length 70.9
  Top Layer w0.2: v1(763,634.5) 764.5,636 RA_26.2@764.5,638.2
  Bottom Layer w0.2: Connector.94@706.755,609.6 714.155,617 729.9,617 741.1,628.2 756.7,628.2 v1(763,634.5)
"IDC10.2. 7": Connector.100 RA_24.3 | length 93.7
  Top Layer w0.2: Connector.100@704.215,607.06 705.5,608.345 707.045,608.345 708.1,609.4 708.1,610.9 708.5,611.3 715,611.3 v1(718.4,614.7) ; v1(763,629.8) 765.9,626.9 773.9,626.9 775.4,628.4 775.4,637.2 RA_24.3@774.3,638.3
  Bottom Layer w0.2: v1(718.4,614.7) 730.2,614.7 742.3,626.8 760,626.8 v1(763,629.8)
"IDC10.2. 8": Connector.93 RA_26.3 | length 72.2
  Top Layer w0.2: v1(763,636.1) 763.7,636.8 RA_26.3@763.7,638.2
  Bottom Layer w0.2: Connector.93@704.215,609.6 712.215,617.6 729.7,617.6 740.7,628.6 755.5,628.6 v1(763,636.1)
"IDC10.3. 1": Connector.56 RA_27.4 | length 245.8
  Top Layer w0.2: v1(769.5,630.7) 769.6,630.6 771.9,630.6 773.2,631.9 v1(773.6,631.9) ; RA_27.4@823.4,636.1 823.4,635.7 v1(825.1,634)
  Bottom Layer w0.2: Connector.56@645.795,703.58 645.795,664.605 677.9,632.5 754.5,632.5 760.9,638.9 763.7,638.9 768.7,633.9 768.7,630.9 769.3,630.9 v1(769.5,630.7) ; v1(773.6,631.9) 775.2,631.9 777.8,629.3 820.4,629.3 v1(825.1,634)
"IDC10.3. 2": Connector.9 RA_29.3 | length 220.4
  Top Layer w0.2: v1(770.7,631.3) 771.5,631.3 773,632.8 774.6,632.8 v1(774.7,632.9) ; v1(797,630.1) 797,635.8 RA_29.3@797.1,635.9
  Bottom Layer w0.2: Connector.9@645.795,706.12 647,704.915 647,664 678,633 754.4,633 760.9,639.5 763.7,639.5 769.1,634.1 769.1,632 769.6,631.5 770.5,631.5 v1(770.7,631.3) ; v1(774.7,632.9) 775,632.9 777.6,630.3 796.8,630.3 v1(797,630.1)
"IDC10.3. 3": Connector.55 RA_27.5 | length 240.1
  Top Layer w0.2: v1(769.8,632.4) 771.5,632.4 772.6,633.5 v1(773.6,633.5) ; RA_27.5@822.6,636.1 822.6,634.8 v1(823.4,634)
  Bottom Layer w0.2: Connector.55@648.335,703.58 648.335,663.265 678.1,633.5 754.2,633.5 760.25,639.55 760.7,640 763.9,640 769.8,634.1 v1(769.8,632.4) ; v1(773.6,633.5) 774,633.9 774.8,633.9 777.8,630.9 820.3,630.9 v1(823.4,634)
"IDC10.3. 4": Connector.10 RA_29.2 | length 216.5
  Top Layer w0.2: v1(770.9,633.3) 771.5,633.3 772.5,634.3 774.3,634.3 v1(774.6,634.6) ; RA_29.2@797.9,635.9 798,635.8 v1(798,631.8)
  Bottom Layer w0.2: Connector.10@648.335,706.12 649.6,704.855 649.6,662.6 678.2,634 754,634 760.5,640.5 764.1,640.5 770.9,633.7 v1(770.9,633.3) ; v1(774.6,634.6) 774.9,634.6 778.2,631.3 797.5,631.3 v1(798,631.8)
"IDC10.3. 5": Connector.54 RA_27.6 | length 233.3
  Top Layer w0.2: v1(771.2,634.6) 771.9,635.3 v1(773.2,635.3) ; v1(821.8,634.1) RA_27.6@821.8,636.1
  Bottom Layer w0.2: Connector.54@650.875,703.58 650.875,662.025 678.4,634.5 753.5,634.5 760,641 764.2,641 770.6,634.6 v1(771.2,634.6) ; v1(773.2,635.3) 775,635.3 777.8,632.5 820.2,632.5 v1(821.8,634.1)
"IDC10.3. 6": Connector.11 RA_29.1 | length 211.8
  Top Layer w0.2: v1(770.9,635.9) 771,636 v1(774.5,636) ; RA_29.1@798.7,635.9 798.7,633.6 v1(799,633.3)
  Bottom Layer w0.2: Connector.11@650.875,706.12 652.1,704.895 652.1,661.6 678.5,635.2 753.3,635.2 759.6,641.5 764.3,641.5 769.9,635.9 v1(770.9,635.9) ; v1(774.5,636) 775,636 777.8,633.2 798.9,633.2 v1(799,633.3)
"IDC10.3. 7": Connector.53 RA_27.7 | length 228.9
  Top Layer w0.2: v1(770,636.9) 773.2,636.9 v1(773.3,636.8) ; v1(820.3,634.2) 821,634.9 RA_27.7@821,636.1
  Bottom Layer w0.2: Connector.53@653.415,703.58 653.415,660.985 678.6,635.8 753.2,635.8 759.3,641.9 764.8,641.9 769.8,636.9 v1(770,636.9) ; v1(773.3,636.8) 775.3,636.8 778,634.1 811.7,634.1 812.9,632.9 819,632.9 v1(820.3,634.2)
"IDC10.3. 8": Connector.12 RA_29.0 | length 209.8
  Top Layer w0.2: v1(771.1,637.7) 772.5,637.7 v1(773.1,638.3) ; RA_29.0@799.5,635.9 800.5,634.9 v1(800.6,634.9)
  Bottom Layer w0.2: Connector.12@653.415,706.12 654.7,704.835 654.7,660.5 678.9,636.3 752.9,636.3 758.9,642.3 765.2,642.3 769.8,637.7 v1(771.1,637.7) ; v1(773.1,638.3) 774.5,638.3 778.1,634.7 800.4,634.7 v1(800.6,634.9)
"IDC10.4. 1": Connector.48 RA_30.4 | length 285.4
  Top Layer w0.2: v1(686.3,637.3) 681.7,632.7 681.7,629.8 686.4,625.1 686.4,619.2 687.9,617.7 697.4,617.7 697.9,618.2 719,618.2 721.6,615.6 721.6,612.3 722,611.9 727.3,611.9 729.3,609.9 734.9,609.9 v1(735.1,610.1) ; RA_30.4@842.1,632.8 843,631.9 v1(843,628.1)
  Bottom Layer w0.2: Connector.48@666.115,703.58 657.6,695.065 657.6,661.1 679.6,639.1 684.5,639.1 v1(686.3,637.3) ; v1(735.1,610.1) 735.8,610.8 807.6,610.8 808.8,612 827,612 832.3,617.3 832.3,622 832.9,622.6 832.9,623.9 833.8,624.8 839.7,624.8 v1(843,628.1)
"IDC10.4. 2": Connector.20 RA_32.0 | length 279.4
  Top Layer w0.2: v1(697.4,637.5) 689.4,629.5 689.4,622 690.3,621.1 720.5,621.1 723.3,618.3 740.9,618.3 744.6,614.6 v1(744.6,614.3) ; RA_32.0@833.8,632.2 833.9,632.1 v1(833.9,628.8)
  Bottom Layer w0.2: Connector.20@673.735,706.12 674.9,704.955 674.9,702.9 661,689 661,663.1 681.6,642.5 692.4,642.5 v1(697.4,637.5) ; v1(744.6,614.3) 745.1,613.8 771.1,613.8 773.1,615.8 780.7,615.8 782.7,613.8 805.2,613.8 807,615.6 825.9,615.6 828,617.7 828,626.2 830.6,628.8 v1(833.9,628.8)
"IDC10.4. 3": Connector.47 RA_30.5 | length 285.2
  Top Layer w0.2: v1(689.3,637.3) 682.6,630.6 682.6,630.3 687.3,625.6 687.3,619.6 688.1,618.8 697,618.8 697.2,619 719.5,619 722.4,616.1 739.5,616.1 740.2,615.4 740.2,612 739.8,612 v1(739.7,611.9) ; RA_30.5@841.3,632.8 841.3,628.4 v1(841.6,628.1)
  Bottom Layer w0.2: Connector.47@668.655,703.58 668.655,702.955 658.5,692.8 658.5,661.7 680.1,640.1 686.5,640.1 v1(689.3,637.3) ; v1(739.7,611.9) 740,611.6 807.1,611.6 808.5,613 826.6,613 831.2,617.6 831.2,623.3 833.3,625.4 838.9,625.4 v1(841.6,628.1)
"IDC10.4. 4": Connector.19 RA_32.1 | length 279
  Top Layer w0.2: v1(694.4,637.4) 687.2,630.2 687.2,627.9 688.6,626.5 688.6,620.4 688.9,620.1 689,620.2 720.2,620.2 722.9,617.5 740.4,617.5 742.5,615.4 v1(742.5,613.2) ; v1(832.9,627.1) 832.9,632.1 RA_32.1@833,632.2
  Bottom Layer w0.2: Connector.19@671.195,706.12 671.195,705.405 672.4,704.2 672.4,702.7 660.1,690.4 660.1,662.6 681.1,641.6 690.6,641.6 694.4,637.8 v1(694.4,637.4) ; v1(742.5,613.2) 742.9,612.8 805.9,612.8 807.6,614.5 826.1,614.5 829.3,617.7 829.3,625.3 831.1,627.1 v1(832.9,627.1)
"IDC10.4. 5": Connector.46 RA_30.6 | length 283.3
  Top Layer w0.2: v1(692.7,637.4) 685.6,630.3 685.6,628.9 688.1,626.4 688.1,620.1 688.5,619.7 696.4,619.7 696.5,619.8 720,619.8 722.8,617 740.1,617 741.5,615.6 v1(741.5,614.1) ; v1(840.2,628.1) 840.2,632.5 RA_30.6@840.5,632.8
  Bottom Layer w0.2: Connector.46@671.195,703.58 671.195,703.195 659.6,691.6 659.6,662.3 680.8,641.1 689.3,641.1 692.7,637.7 v1(692.7,637.4) ; v1(741.5,614.1) 741.7,613.9 741.7,612.6 741.9,612.4 806.4,612.4 808,614 826.2,614 830,617.8 830,624.7 831.4,626.1 838.2,626.1 v1(840.2,628.1)
"IDC10.4. 6": Connector.18 RA_32.2 | length 278.5
  Top Layer w0.2: v1(691.1,637.3) 685.2,631.4 685.2,628.4 687.7,625.9 687.7,619.8 688.3,619.2 696.6,619.2 696.8,619.4 719.7,619.4 722.6,616.5 739.9,616.5 740.8,615.6 740.8,613.1 v1(740.9,613) ; v1(831.7,625.3) 831.7,631.7 RA_32.2@832.2,632.2
  Bottom Layer w0.2: Connector.18@668.655,706.12 668.655,705.545 670,704.2 670,703 659.1,692.1 659.1,661.9 680.4,640.6 687.8,640.6 v1(691.1,637.3) ; v1(740.9,613) 740.9,612.4 741.3,612 806.8,612 808.3,613.5 826.4,613.5 830.6,617.7 830.6,624.5 831.6,625.5 831.6,625.4 v1(831.7,625.3)
"IDC10.4. 7": Connector.45 RA_30.7 | length 280.8
  Top Layer w0.2: v1(696,637.5) 689,630.5 689,621 689.4,620.6 720.4,620.6 723.1,617.9 740.6,617.9 743.3,615.2 v1(743.3,614.2) ; v1(838.8,628.8) 839.7,629.7 RA_30.7@839.7,632.8
  Bottom Layer w0.2: Connector.45@673.735,703.58 673.735,703.035 660.6,689.9 660.6,662.8 681.3,642.1 691.4,642.1 v1(696,637.5) ; v1(743.3,614.2) 744.2,613.3 805.5,613.3 807.3,615.1 826,615.1 828.7,617.8 828.7,626.2 830.5,628 838,628 v1(838.8,628.8)
"IDC10.4. 8": Connector.17 RA_32.3 | length 280.9
  Top Layer w0.2: v1(687.9,637.3) 682.1,631.5 682.1,630.1 686.8,625.4 686.8,619.5 688.1,618.2 697.1,618.2 697.5,618.6 719.2,618.6 722,615.8 722,612.8 722.4,612.4 727.5,612.4 729.2,610.7 733.8,610.7 v1(733.9,610.8) ; RA_32.3@831.4,632.2 830.1,630.9 830.1,624.7 v1(832,622.8)
  Bottom Layer w0.2: Connector.17@666.115,706.12 667.4,704.835 667.4,702.9 658,693.5 658,661.4 679.8,639.6 685.7,639.6 687.9,637.4 v1(687.9,637.3) ; v1(733.9,610.8) 734.3,611.2 807.4,611.2 808.7,612.5 826.8,612.5 831.8,617.5 831.8,622.6 v1(832,622.8)
"IDC10.5. 2": Connector.40 RA_33.4 | length 318.4
  Top Layer w0.2: v1(713.5,649.1) v1(718.1,649.1) ; v1(782.4,640.4) 782.4,623.9 781.2,622.7 781.2,617.3 787,611.5 787,604.8 788,603.8 858.8,603.8 875.6,620.6 RA_33.4@875.6,634.7
  Bottom Layer w0.2: Connector.40@686.435,703.58 683.1,700.245 683.1,649.8 684.6,648.3 711.9,648.3 712.7,649.1 v1(713.5,649.1) ; v1(718.1,649.1) 719.9,649.1 721.3,650.5 771.7,650.5 774.7,653.5 781.6,653.5 782.4,652.7 v1(782.4,640.4)
"IDC10.5. 3": Connector.25 RA_35.3 | length 318.2
  Top Layer w0.2: v1(715.7,649.9) 719.3,649.9 v1(719.4,649.8) ; v1(783.2,638.5) 783.2,623.3 784,622.5 784,615.3 787.4,611.9 787.4,605.2 788.3,604.3 803.6,604.3 809.4,610.1 814.7,610.1 820.5,604.3 855.4,604.3 866.7,615.6 RA_35.3@866.7,634.4
  Bottom Layer w0.2: Connector.25@686.435,706.12 687.6,704.955 687.6,703.3 685.5,701.2 684.9,701.2 683.5,699.8 683.5,650 684.1,649.4 709.7,649.4 710.2,649.9 v1(715.7,649.9) ; v1(719.4,649.8) 720,649.8 721.1,650.9 771.4,650.9 774.4,653.9 781.9,653.9 783.2,652.6 v1(783.2,638.5)
"IDC10.5. 4": Connector.39 RA_33.5 | length 319.4
  Top Layer w0.2: v1(714.5,650.7) 719.7,650.7 v1(720.2,651.2) ; v1(783.9,637.4) 783.9,623.4 784.5,622.8 784.5,615.4 787.8,612.1 787.8,605.4 788.4,604.8 803.3,604.8 809,610.5 815,610.5 820.7,604.8 854.8,604.8 v1(855.2,605.2) ; v1(858.7,605) 874.8,621.1 RA_33.5@874.8,634.7
  Bottom Layer w0.2: Connector.39@688.975,703.58 683.9,698.505 683.9,650.9 684.9,649.9 709.4,649.9 710.2,650.7 v1(714.5,650.7) ; v1(720.2,651.2) 720.4,651.4 771.3,651.4 774.3,654.4 782.1,654.4 783.8,652.7 783.8,639.4 784.2,639 784.2,637.6 784.1,637.6 v1(783.9,637.4) ; v1(855.2,605.2) 855.4,605 v1(858.7,605)
"IDC10.5. 5": Connector.26 RA_35.2 | length 317
  Top Layer w0.2: v1(715.9,651.4) 716.5,652 720.9,652 v1(721.6,652.7) ; v1(784.6,635.6) 784.6,623.3 785.1,622.8 785.1,615.4 788.3,612.2 788.3,605.8 788.8,605.3 803,605.3 808.7,611 815.3,611 821,605.3 854.3,605.3 865.6,616.6 v1(865.6,628.9) ; v1(867.5,628.9) RA_35.2@867.5,634.4
  Bottom Layer w0.2: Connector.26@688.975,706.12 690.2,704.895 690.2,702.8 684.4,697 684.4,651 685,650.4 709.2,650.4 710.2,651.4 v1(715.9,651.4) ; v1(721.6,652.7) 722.5,651.8 771,651.8 774,654.8 782.5,654.8 784.3,653 784.3,647.9 784.7,647.5 784.7,635.7 v1(784.6,635.6) ; v1(865.6,628.9) v1(867.5,628.9)
"IDC10.5. 6": Connector.38 RA_33.6 | length 316.5
  Top Layer w0.2: v1(719.2,653) 719.7,653.5 v1(723.3,653.5) ; v1(785.5,637) 785.5,615.9 788.8,612.6 788.8,606.6 789.6,605.8 802.7,605.8 808.4,611.5 815.5,611.5 821.1,605.9 851.9,605.9 852,605.8 853.5,605.8 v1(854,606.3) ; v1(858.9,606.4) 874,621.5 RA_33.6@874,634.7
  Bottom Layer w0.2: Connector.38@691.515,703.58 691.515,703.015 685,696.5 685,651.8 685.8,651 709.2,651 710.1,651.9 714.9,651.9 716,653 v1(719.2,653) ; v1(723.3,653.5) 724.5,652.3 770.8,652.3 773.8,655.3 782.7,655.3 785.1,652.9 785.1,637.4 v1(785.5,637) ; v1(854,606.3) 858.8,606.3 v1(858.9,606.4)
"IDC10.5. 7": Connector.27 RA_35.1 | length 317.2
  Top Layer w0.2: v1(723.6,657) 724.9,655.7 v1(724.9,654.4) ; v1(785.9,638.4) 786.5,637.8 786.5,615.7 789.3,612.9 789.3,606.9 789.9,606.3 802.6,606.3 808.3,612 815.6,612 821.1,606.5 852.6,606.5 864.4,618.3 v1(864.4,627.5) ; v1(867.6,627.5) 868.3,628.2 RA_35.1@868.3,634.4
  Bottom Layer w0.2: Connector.27@691.515,706.12 692.7,704.935 692.7,703 685.5,695.8 685.5,652.2 686.2,651.5 708.9,651.5 709.8,652.4 714.6,652.4 716,653.8 720.4,653.8 v1(723.6,657) ; v1(724.9,654.4) 726.6,652.7 770.6,652.7 773.7,655.8 782.9,655.8 785.6,653.1 785.6,638.7 v1(785.9,638.4) ; v1(864.4,627.5) v1(867.6,627.5)
"IDC10.5. 8": Connector.37 RA_33.7 | length 315.7
  Top Layer w0.2: v1(724.4,658) 725.9,656.5 v1(725.9,655.4) ; v1(786.5,639.6) 787,639.1 787,615.9 789.7,613.2 789.7,607.5 790.4,606.8 802.4,606.8 808.1,612.5 815.7,612.5 821.2,607 852.2,607 863.7,618.5 v1(863.7,624.2) ; v1(867.6,624.3) 873.2,629.9 RA_33.7@873.2,634.7
  Bottom Layer w0.2: Connector.37@694.055,703.58 685.9,695.425 685.9,652.8 686.7,652 708.6,652 709.5,652.9 714.1,652.9 719.2,658 v1(724.4,658) ; v1(725.9,655.4) 728.2,653.1 770.4,653.1 773.5,656.2 783.3,656.2 786.5,653 v1(786.5,639.6) ; v1(863.7,624.2) 863.8,624.3 v1(867.6,624.3)
"IDC10.5. 9": Connector.28 RA_35.0 | length 316.9
  Top Layer w0.2: v1(736,658.9) 736,656.4 v1(736.3,656.1) ; v1(787.7,637) 787.7,615.9 790.1,613.5 790.1,607.9 790.7,607.3 802.2,607.3 808,613.1 815.7,613.1 821.4,607.4 851.5,607.4 862.7,618.6 862.7,625 v1(863.5,625.8) ; v1(867.6,625.8) 869.1,627.3 RA_35.0@869.1,634.4
  Bottom Layer w0.2: Connector.28@694.055,706.12 695.3,704.875 695.3,702.3 686.3,693.3 686.3,653.3 687,652.6 708.3,652.6 709.1,653.4 713.6,653.4 718.9,658.7 728,658.7 728.2,658.5 735.6,658.5 v1(736,658.9) ; v1(736.3,656.1) 738.9,653.5 770.2,653.5 773.3,656.6 783.6,656.6 787.1,653.1 787.1,640.6 787.5,640.2 787.5,637.2 v1(787.7,637) ; v1(863.5,625.8) v1(867.6,625.8)
KLAV_STB1: Connector.124 RA17.2 | length 244.6
  Top Layer w0.2: v1(650.2,594.5) 651.1,595.4 v1(653.7,595.4) ; v1(656.7,595.4) 665,595.4 666.6,597 757.6,597 761.9,592.7 v1(763.2,592.7) ; v1(764.7,596.6) 767.1,599 813.3,599 815.8,596.5 815.8,559 822.8,552 RA17.2@824.5,552
  Bottom Layer w0.2: Connector.124@635.635,607.06 635.2,606.625 635.2,604.2 638.7,600.7 640,600.7 646.2,594.5 v1(650.2,594.5) ; v1(653.7,595.4) v1(656.7,595.4) ; v1(763.2,592.7) 763.2,595.1 v1(764.7,596.6)
KLAV_STB2: Connector.123 RA17.3 | length 242.7
  Top Layer w0.2: v1(649.2,595.7) 650.2,596.7 v1(653.7,596.7) ; v1(656.6,596.7) 656.7,596.8 665.8,596.8 666.5,597.5 758.3,597.5 v1(762,593.8) ; v1(763.5,597.4) 765.5,599.4 813.7,599.4 816.3,596.8 816.3,559.3 822.8,552.8 RA17.3@824.5,552.8
  Bottom Layer w0.2: Connector.123@638.175,607.06 637.86,607.06 636.4,605.6 636.4,603.885 638.485,601.8 639.6,601.8 645.7,595.7 v1(649.2,595.7) ; v1(653.7,596.7) v1(656.6,596.7) ; v1(762,593.8) 762,595.9 v1(763.5,597.4)
KLAV_STB3: Connector.122 RA17.1 | length 255.6
  Top Layer w0.2: v1(635.5,602.1) 635.755,602.1 Connector.122@640.715,607.06 ; v1(661,583.8) 662.7,585.5 705.5,585.5 708.5,588.5 718,588.5 v1(718.7,587.8) ; v1(745.8,587.9) 757.7,587.9 761.7,591.9 v1(764.4,591.9) ; v1(765.9,595.7) 768.8,598.6 813.1,598.6 815.3,596.4 815.3,558.8 822.9,551.2 RA17.1@824.5,551.2
  Bottom Layer w0.2: v1(635.5,602.1) 636.3,602.1 638.4,600 640,600 650.9,589.1 650.9,585.6 652.7,583.8 v1(661,583.8) ; v1(718.7,587.8) 745.7,587.8 v1(745.8,587.9) ; v1(764.4,591.9) 764.4,594.2 v1(765.9,595.7)
KLAV_STR1: Connector.69 RA18.4 | length 234.1
  Top Layer w0.2: v1(656.5,599.9) 656.6,599.8 814.1,599.8 816.8,597.1 816.8,559.5 820.8,555.5 RA18.4@824.4,555.5
  Bottom Layer w0.2: Connector.69@635.635,609.6 636.835,608.4 638.4,608.4 639.2,607.6 639.2,606 645.3,599.9 v1(656.5,599.9)
KLAV_STR2: Connector.70 RA18.7 | length 245
  Top Layer w0.2: v1(634.4,605.1) v1(637.3,605.1) ; v1(660.9,601.9) 661.3,602.3 733.5,602.3 734.6,601.2 755.325,601.2 755.725,601.6 814.2,601.6 818.2,597.6 818.2,560.1 820.4,557.9 RA18.7@824.4,557.9
  Bottom Layer w0.2: v1(634.4,605.1) 634.5,605.2 634.5,610.2 635.3,611 636.775,611 Connector.70@638.175,609.6 ; v1(637.3,605.1) 638.05,605.85 638.55,605.85 645.5,598.9 657.9,598.9 v1(660.9,601.9)
KLAV_STR3: Connector.71 RA18.6 | length 231.9
  Top Layer w0.2: v1(658.2,601.7) 658.8,601.1 697.625,601.1 697.925,600.8 774.975,600.8 775.275,601.1 814.1,601.1 817.8,597.4 817.8,559.9 820.6,557.1 RA18.6@824.4,557.1
  Bottom Layer w0.2: Connector.71@640.715,609.6 639.6,608.485 639.6,606.3 645.1,600.8 657.3,600.8 v1(658.2,601.7)
KLAV_STR4: Connector.72 RA18.5 | length 226.4
  Top Layer w0.2: v1(656.3,602.1) 658.1,600.3 814.2,600.3 817.3,597.2 817.3,559.7 820.7,556.3 RA18.5@824.4,556.3
  Bottom Layer w0.2: Connector.72@643.255,609.6 644.7,608.155 644.7,606.2 648.8,602.1 v1@656.4,602.1
LCD_VOUT: Rvar2.2 WG1.17 | length 126.3
  Top Layer w0.2: Rvar2.2@779.8,614.4 784,610.2 v1(784,602.7)
  Bottom Layer w0.2: WG1.17@739.28,542 739.28,539.22 740.7,537.8 783,537.8 784.6,539.4 784.6,602.1 v1(784,602.7)
LCDCLK: Connector.116 SREGLCD1.8 | length 108.2
  Top Layer w0.2: v1(678,623) 682.7,623 v1(682.9,622.8) ; v1(717.6,622.8) 729.1,622.8 729.7,623.4 736.12,623.4 736.22,623.3 748.86,623.3 748.96,623.4 755.38,623.4 SREGLCD1.8@755.4,623.42
  Bottom Layer w0.2: Connector.116@655.955,607.06 657,608.105 657,611 669,623 v1(678,623) ; v1(682.9,622.8) v1(717.6,622.8)
LCDCS1: Connector.79 WG1.14 | length 153.8
  Top Layer w0.2: Connector.79@661.035,609.6 662.3,608.335 662.3,604.4 663.3,603.4 735.2,603.4 735.4,603.6 735.4,604.6 v1(734.4,605.6)
  Bottom Layer w0.2: v1(734.4,605.6) 738.4,605.6 748,596 748,543.1 WG1.14@746.9,542
LCDCS2: Connector.80 WG1.15 | length 146.1
  Top Layer w0.2: Connector.80@663.575,609.6 665.1,608.075 665.1,604.9 665.9,604.1 v1(734.4,604.1)
  Bottom Layer w0.2: v1(734.4,604.1) 738.3,604.1 747.5,594.9 747.5,553.3 744.36,550.16 WG1.15@744.36,542
LCDD/I: Connector.114 WG1.3 | length 170.5
  Top Layer w0.2: v1(667.8,599.1) 760.8,599.1 774.84,585.06 WG1.3@774.84,542
  Bottom Layer w0.2: Connector.114@661.035,607.06 662.275,608.3 664,608.3 665,607.3 665,601.4 667.2,599.2 667.7,599.2 v1(667.8,599.1)
LCDDATA: Connector.77 SREGLCD1.1 SREGLCD1.2 | length 129.2
  Top Layer w0.2: v1(679.2,623.9) v1(683.9,623.9) v1@683.8,624 ; v1(718.7,623.7) 716.6,623.7 716.1,623.2 716.1,622.6 717.1,621.6 720.8,621.6 723.7,618.7 741.1,618.7 744.5,615.3 v1(745.7,615.3) ; SREGLCD1.1@763.2,615.8 763.2,616.435 ; SREGLCD1.2@763.2,617.07 763.2,616.435 ; v1(764.9,615.5) 764.135,615.5 763.2,616.435
  Bottom Layer w0.2: Connector.77@655.955,609.6 656,609.645 656,611.1 668.8,623.9 v1(679.2,623.9) ; v1(683.9,623.9) 718.5,623.9 v1(718.7,623.7) ; v1(745.7,615.3) 746.7,614.3 763.7,614.3 v1(764.9,615.5)
LCDOE: Connector.113 WG1.5 | length 164.3
  Top Layer w0.2: v1(665.6,598) 760,598 769.76,588.24 WG1.5@769.76,542
  Bottom Layer w0.2: Connector.113@663.575,607.06 664.3,606.335 664.3,599.3 v1(665.6,598)
LCDR/W: Connector.115 WG1.4 | length 169.7
  Top Layer w0.2: v1(664.2,598) 665.2,599 666.3,599 666.9,598.4 760.5,598.4 772.3,586.6 WG1.4@772.3,542
  Bottom Layer w0.2: Connector.115@658.495,607.06 658.495,606.805 663.8,601.5 663.8,598.4 v1(664.2,598)
LCDRST: Connector.78 WG1.16 | length 150.7
  Top Layer w0.2: Connector.78@658.495,609.6 658.495,609.105 659.8,607.8 659.8,606 663.1,602.7 v1(734.4,602.7)
  Bottom Layer w0.2: v1(734.4,602.7) 738.8,602.7 747,594.5 747,553.5 741.82,548.32 WG1.16@741.82,542
Net1_1: 1.1 R5.2 RA17.4 | length 34.4
  Top Layer w0.2: RA17.4@825.8,552.8 831.82,552.8 1.1@845.1,539.52
  Top Layer w1: R5.2@845.1,530 845.1,539.52 1.1@845.18,539.6
Net1_2: 1.2 RA18.0 | length 28.6
  Top Layer w0.2: RA18.0@825.7,555.5 831.82,555.5 1.2@847.72,539.6
Net1_3: 1.3 R4.2 RA17.5 | length 49.7
  Top Layer w0.2: RA17.5@825.8,552 825.9,552.1 831.7,552.1 837.1,546.7 837.1,537.4 840.9,533.6 841.9,533.6 v1(842,533.7)
  Top Layer w1: 1.3@850.26,539.6 850.3,539.56 R4.2@850.3,530
  Bottom Layer w0.2: v1(842,533.7) 844.36,533.7 1.3@850.26,539.6
Net1_4: 1.4 RA18.1 | length 34
  Top Layer w0.2: RA18.1@825.7,556.3 836.1,556.3 1.4@852.8,539.6
Net1_5: 1.5 R3.2 RA17.6 | length 55.7
  Top Layer w0.2: RA17.6@825.8,551.2 831.9,551.2 836.5,546.6 836.5,536.2 839.9,532.8 v1(843.2,532.8)
  Top Layer w1: 1.5@855.34,539.6 855.34,530.16 R3.2@855.5,530
  Bottom Layer w0.2: v1(843.2,532.8) 848.54,532.8 1.5@855.34,539.6
Net1_6: 1.6 RA18.2 | length 39.4
  Top Layer w0.2: RA18.2@825.7,557.1 840.38,557.1 1.6@857.88,539.6
Net1_7: 1.7 RA18.3 | length 42.3
  Top Layer w0.2: RA18.3@825.7,557.9 842.12,557.9 1.7@860.42,539.6
Net2_1: 2.1 RA24.6 | length 6.4
  Top Layer w0.2: 2.1@668.3,580.4 668.3,579.7 671.2,576.8 RA24.6@671.2,575.2
Net2_2: 2.2 RA24.7 | length 5.7
  Top Layer w0.2: 2.2@670.84,580.4 670.84,578.36 672,577.2 RA24.7@672,575.2
Net2_3: 2.3 RA24.5 | length 15.3
  Top Layer w0.2: RA24.5@670.4,575.2 670.4,576 667,579.4 667,581.2 667.8,582 672.6,582 673.38,581.22 2.3@673.38,580.4
Net2_4: 2.4 RA24.4 | length 18.6
  Top Layer w0.2: RA24.4@669.6,575.2 666.2,578.6 666.2,581.3 667.4,582.5 673.82,582.5 2.4@675.92,580.4
Net2_5: 2.5 RA26.6 | length 9.1
  Top Layer w0.2: RA26.6@683.6,575.1 v1(683.6,577.6)
  Bottom Layer w0.2: 2.5@678.46,580.4 678.46,579.84 679.2,579.1 682.1,579.1 v1(683.6,577.6)
Net2_6: 2.6 RA26.7 | length 9.1
  Top Layer w0.2: 2.6@681,580.4 681.1,580.3 681.1,575.2 681.8,574.5 683.8,574.5 RA26.7@684.4,575.1
Net2_7: 2.7 RA26.4 | length 5.9
  Top Layer w0.2: RA26.4@682,575.1 682,578.86 2.7@683.54,580.4
Net2_8: 2.8 RA26.5 | length 8
  Top Layer w0.2: RA26.5@682.8,575.1 682.8,576.3 682.5,576.6 682.5,577.9 683.5,578.9 685.4,578.9 686.08,579.58 2.8@686.08,580.4
Net2_11: 2.11 RA27.4 | length 6
  Top Layer w0.2: 2.11@693.7,580.4 693.7,579.2 696,576.9 RA27.4@696,575.4
Net2_12: 2.12 RA27.5 | length 5.2
  Top Layer w0.2: 2.12@696.24,580.4 696.8,579.84 RA27.5@696.8,575.4
Net2_13: 2.13 RA27.6 | length 5.5
  Top Layer w0.2: RA27.6@697.6,575.4 697.7,575.5 697.7,578.1 698.78,579.18 2.13@698.78,580.4
Net2_14: 2.14 RA27.7 | length 6.2
  Top Layer w0.2: RA27.7@698.4,575.4 698.4,577.48 2.14@701.32,580.4
Net2_15: 2.15 RA25.4 | length 15.3
  Top Layer w0.2: 2.15@703.86,580.4 710.46,587 716,587 RA25.4@716.3,586.7
Net2_16: 2.16 RA25.6 | length 25.6
  Top Layer w0.2: 2.16@706.4,580.4 704.6,578.6 703.1,578.6 702.7,579 702.7,581.5 709,587.8 717.2,587.8 717.9,587.1 RA25.6@717.9,586.7
Net2_17: 2.17 RA25.5 | length 11.9
  Top Layer w0.2: 2.17@708.94,580.4 708.94,582.34 712.7,586.1 716.5,586.1 RA25.5@717.1,586.7
Net2_18: 2.18 RA25.7 | length 16.2
  Top Layer w0.2: 2.18@711.48,580.4 718.3,580.4 721.1,583.2 721.1,585.9 720.3,586.7 RA25.7@718.7,586.7
Net2_19: 2.19 RA23.1 | length 26.1
  Top Layer w0.2: RA23.1@702.8,575.5 v1(702.8,577)
  Bottom Layer w0.2: v1(702.8,577) 700,579.8 700,584.16 2.19@711.48,595.64
Net2_20: 2.20 RA23.0 | length 27.2
  Top Layer w0.2: v1(700.9,576.9) 702,575.8 RA23.0@702,575.5
  Bottom Layer w0.2: v1(700.9,576.9) 700,576.9 697.6,579.3 697.6,584.3 2.20@708.94,595.64
Net2_21: 2.21 RA23.2 | length 30.9
  Top Layer w0.2: v1(696.2,582.2) 696.5,581.9 701.6,581.9 702.3,581.2 702.3,578.7 702.8,578.2 703.1,578.2 704,577.3 704,575.9 RA23.2@703.6,575.5
  Bottom Layer w0.2: v1(696.2,582.2) 696.2,585.44 2.21@706.4,595.64
Net2_24: 2.24 RA23.3 | length 32.7
  Top Layer w0.2: RA23.3@704.4,575.5 705.4,576.5 v1(705.4,577)
  Bottom Layer w0.2: 2.24@698.78,595.64 695,591.86 695,578.8 698.3,575.5 703.9,575.5 v1(705.4,577)
Net2_25: 2.25 RA21.0 | length 27.2
  Top Layer w0.2: v1(688.8,582.3) 689.7,581.4 689.7,578.4 690.3,577.8 RA21.0@690.3,575.4
  Bottom Layer w0.2: v1(688.8,582.3) 690.3,582.3 690.8,581.8 693.1,581.8 693.8,582.5 693.8,593.2 2.25@696.24,595.64
Net2_26: 2.26 RA21.1 | length 22.1
  Top Layer w0.2: RA21.1@691.1,575.4 691.1,578.3 690.1,579.3 690.1,581.5 v1(691.5,582.9)
  Bottom Layer w0.2: v1(691.5,582.9) 693.1,584.5 693.1,595.04 2.26@693.7,595.64
Net2_27: 2.27 RA21.2 | length 24.1
  Top Layer w0.2: v1(691.5,584.6) 692.6,583.5 692.6,579.6 693.9,578.3 693.9,575.2 693.4,574.7 692.6,574.7 RA21.2@691.9,575.4
  Bottom Layer w0.2: 2.27@691.16,595.64 691.5,595.3 v1(691.5,584.6)